# EAGLE board SOFTWEAR_MASTER (EAGLE 9.4.2)
REV: D
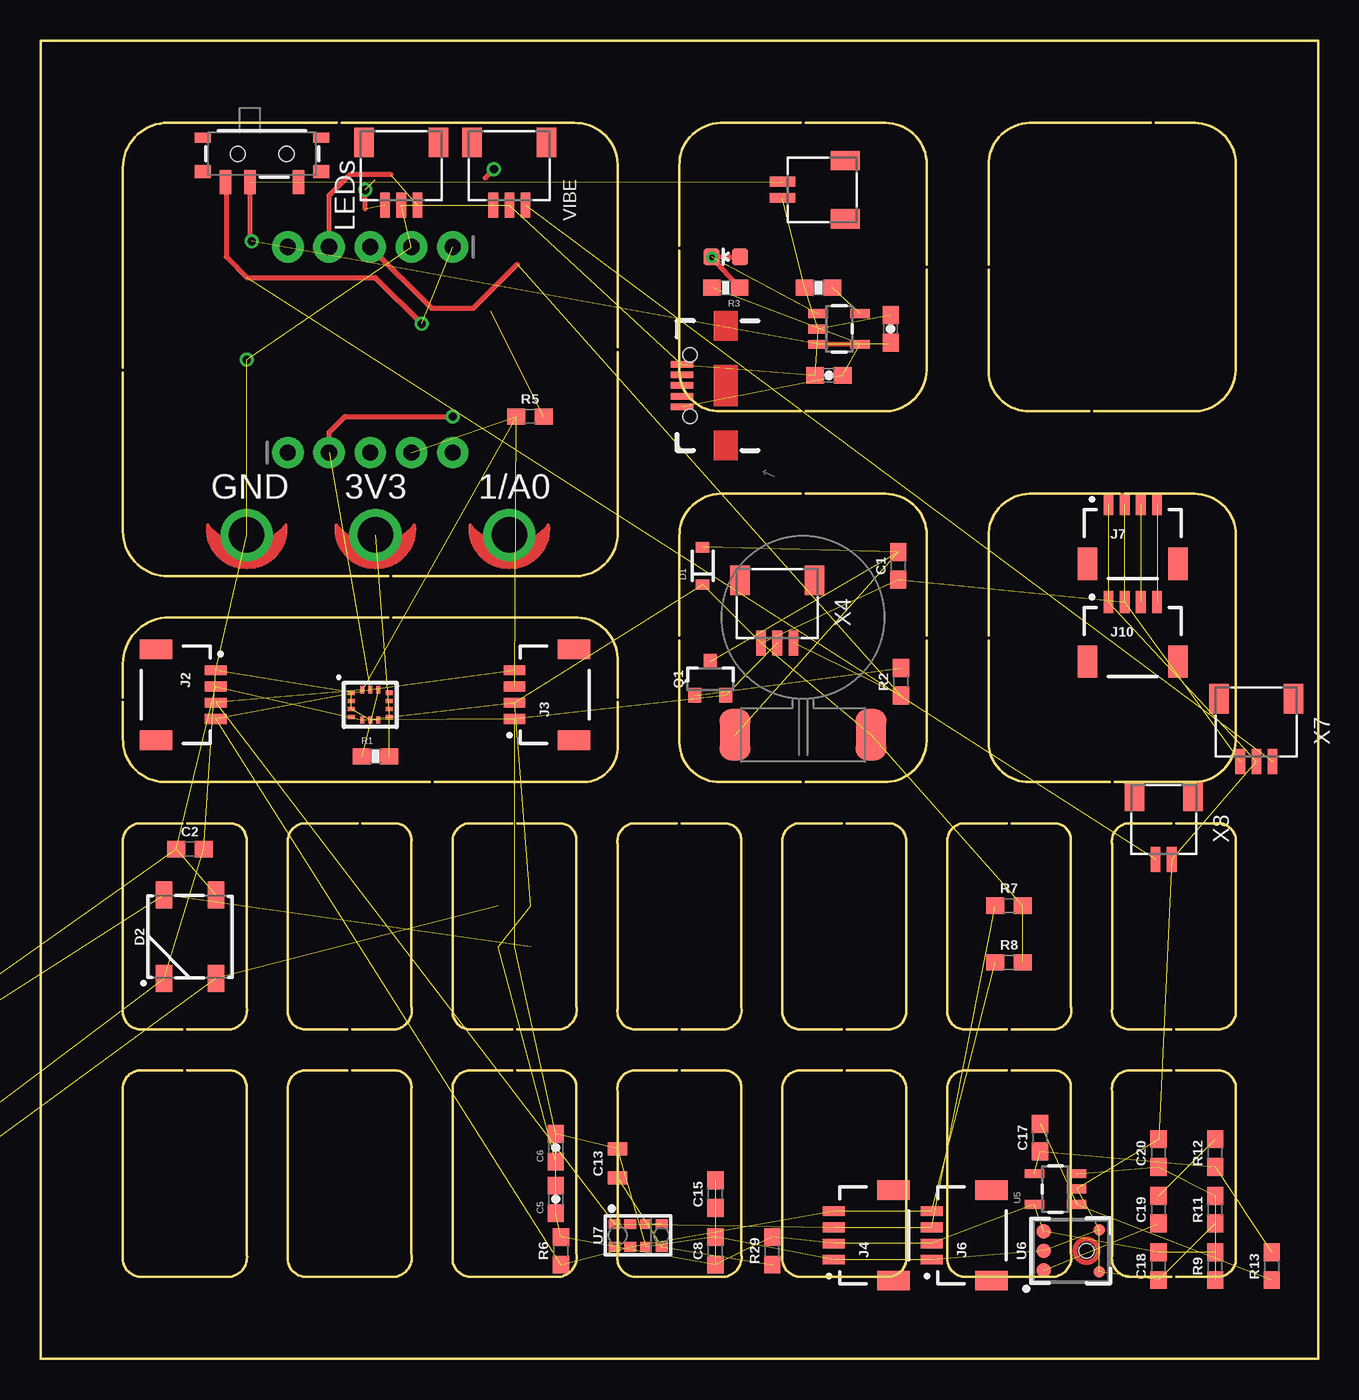
[diagram p0: board, top side]
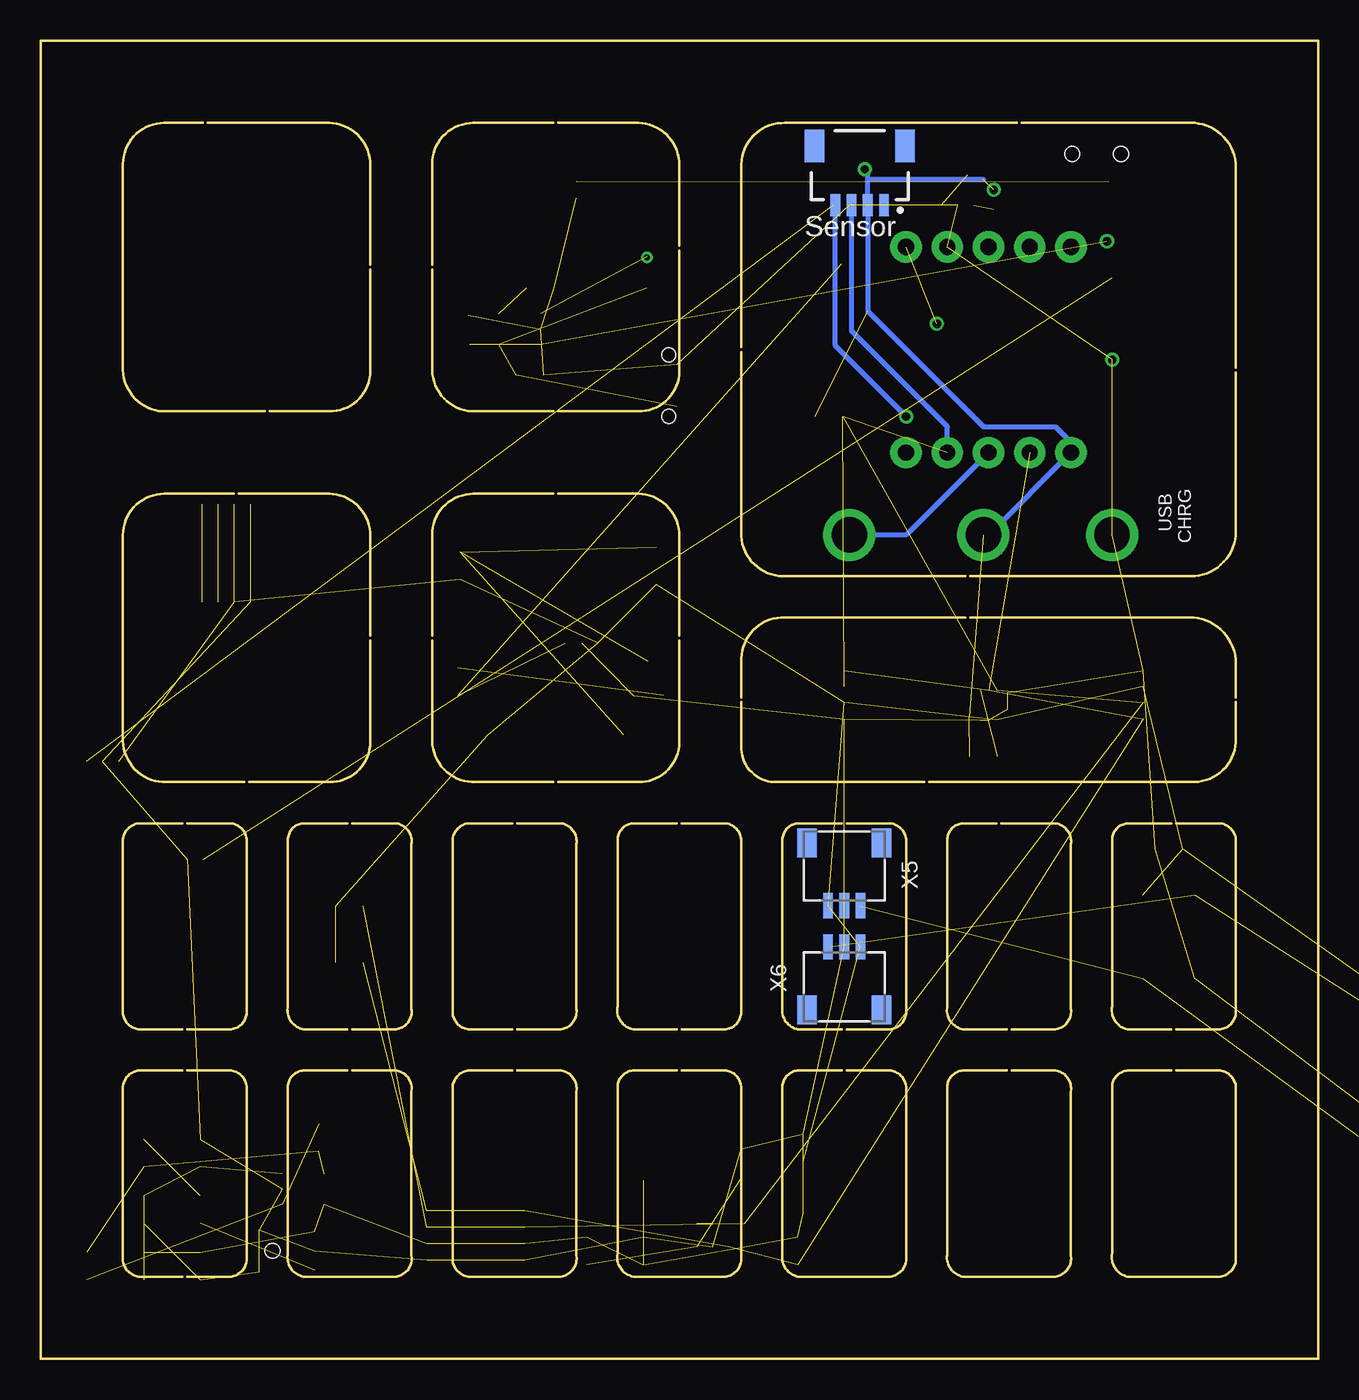
[diagram p1: board, bottom side, seen from below]

Size 78.74 x 81.28 mm. Coordinates in mm from the lower left corner, seen from the top.
Outline: 9.04,20.32 11.75,20.32 arc90 12.7,21.75 12.7,31.91 arc90 11.75,33.02 9.04,33.02
Outline: 8.74,20.32 6.03,20.32 arc-90 5.08,21.59 5.08,31.75 arc-90 6.03,33.02 8.74,33.02
Outline: 8.74,17.78 6.03,17.78 arc90 5.08,16.51 5.08,6.35 arc90 6.03,5.08 11.75,5.08 arc90 12.7,6.51 12.7,16.67 arc90 11.75,17.78 9.04,17.78
Outline: 19.2,20.32 21.91,20.32 arc90 22.86,21.75 22.86,31.91 arc90 21.91,33.02 19.84,33.02
Outline: 18.9,20.32 16.19,20.32 arc-90 15.24,21.59 15.24,31.75 arc-90 16.19,33.02 19.53,33.02
Outline: 18.9,17.78 16.19,17.78 arc90 15.24,16.51 15.24,6.35 arc90 16.19,5.08 21.91,5.08 arc90 22.86,6.51 22.86,16.67 arc90 21.91,17.78 19.2,17.78
Outline: 29.06,17.78 26.35,17.78 arc90 25.4,16.51 25.4,6.35 arc90 26.35,5.08 32.07,5.08 arc90 33.02,6.51 33.02,16.67 arc90 32.07,17.78 29.36,17.78
Outline: 29.36,20.32 32.07,20.32 arc90 33.02,21.75 33.02,31.91 arc90 32.07,33.02 29.36,33.02
Outline: 29.06,20.32 26.35,20.32 arc-90 25.4,21.59 25.4,31.75 arc-90 26.35,33.02 29.06,33.02
Outline: 39.22,17.78 36.51,17.78 arc90 35.56,16.51 35.56,6.35 arc90 36.51,5.08 42.23,5.08 arc90 43.18,6.51 43.18,16.67 arc90 42.23,17.78 39.52,17.78
Outline: 39.52,20.32 42.23,20.32 arc90 43.18,21.75 43.18,31.91 arc90 42.23,33.02 39.52,33.02
Outline: 39.22,20.32 36.51,20.32 arc-90 35.56,21.59 35.56,31.75 arc-90 36.51,33.02 39.22,33.02
Outline: 49.38,17.78 46.67,17.78 arc90 45.72,16.51 45.72,6.35 arc90 46.67,5.08 52.39,5.08 arc90 53.34,6.35 53.34,16.51 arc90 52.39,17.78 49.68,17.78
Outline: 49.68,20.32 52.39,20.32 arc90 53.34,21.59 53.34,31.75 arc90 52.39,33.02 49.68,33.02
Outline: 49.38,20.32 46.67,20.32 arc-90 45.72,21.59 45.72,31.75 arc-90 46.67,33.02 49.38,33.02
Outline: 59.84,20.32 62.55,20.32 arc90 63.5,21.75 63.5,31.91 arc90 62.55,33.02 59.84,33.02
Outline: 59.54,20.32 56.83,20.32 arc-90 55.88,21.59 55.88,31.75 arc-90 56.83,33.02 59.54,33.02
Outline: 59.54,17.78 56.83,17.78 arc90 55.88,16.51 55.88,6.35 arc90 56.83,5.08 62.55,5.08 arc90 63.5,6.51 63.5,16.67 arc90 62.55,17.78 59.84,17.78
Outline: 69.7,33.02 66.99,33.02 arc90 66.04,31.75 66.04,21.59 arc90 66.99,20.32 69.7,20.32
Outline: 70,33.02 72.71,33.02 arc-90 73.66,31.75 73.66,21.59 arc-90 72.71,20.32 70,20.32
Outline: 69.7,17.78 66.99,17.78 arc90 66.04,16.51 66.04,6.35 arc90 66.99,5.08 69.7,5.08
Outline: 70,17.78 72.71,17.78 arc-90 73.66,16.51 73.66,6.35 arc-90 72.71,5.08 70,5.08
Outline: 5.08,40.49 5.08,38.26 arc90 7.62,35.56 23.98,35.56
Outline: 5.08,40.79 5.08,42.86 arc-90 7.94,45.72 21.44,45.72
Outline: 35.56,40.79 35.56,43.18 arc90 32.86,45.72 21.74,45.72
Outline: 35.56,40.49 35.56,37.78 arc-90 33.5,35.56 24.28,35.56
Outline: 46.84,53.34 41.91,53.34 arc90 39.37,50.72 39.37,44.6
Outline: 47.14,53.34 52.07,53.34 arc-90 54.61,50.8 54.61,44.6
Outline: 47.14,35.56 51.91,35.56 arc90 54.61,38.1 54.61,44.3
Outline: 46.84,35.56 41.91,35.56 arc-90 39.37,38.02 39.37,44.3
Outline: 58.42,44.3 58.42,38.02 arc90 60.96,35.56 65.89,35.56
Outline: 58.42,44.6 58.42,50.72 arc-90 60.96,53.34 66.52,53.34
Outline: 58.42,67.16 58.42,60.88 arc90 60.96,58.42 64.62,58.42
Outline: 58.42,67.46 58.42,73.58 arc-90 60.96,76.2 68.43,76.2
Outline: 54.61,67.46 54.61,73.66 arc90 52.07,76.2 47.14,76.2
Outline: 54.61,67.16 54.61,60.96 arc-90 51.91,58.42 47.14,58.42
Outline: 35.56,62.08 35.56,50.96 arc-90 33.02,48.26 21.74,48.26
Outline: 35.56,62.38 35.56,73.66 arc90 32.86,76.2 18.57,76.2
Outline: 5.08,60.81 5.08,51.28 arc90 7.62,48.26 21.44,48.26
Outline: 5.08,61.11 5.08,73.18 arc-90 7.62,76.2 18.26,76.2
Outline: 66.83,53.34 71.12,53.34 arc-90 73.66,50.8 73.66,38.1 arc-90 70.96,35.56 66.19,35.56
Outline: 64.92,58.42 70.96,58.42 arc90 73.66,60.96 73.66,73.66 arc90 71.12,76.2 68.73,76.2
Outline: 46.84,76.2 41.91,76.2 arc90 39.37,73.58 39.37,68.64
Outline: 39.37,68.34 39.37,60.88 arc90 41.91,58.42 46.84,58.42
Outline: 0,0 0,81.28 78.74,81.28 78.74,0 0,0
Copper layers (1*16): Top 0.035mm / dielectric 1.5mm / Bottom 0.035mm
Design rules "SparkFun-2-layer-TIGHT": minimum track width 7mil, minimum drill 15mil, track to track 7mil, track to pad 7mil, pad to pad 7mil, via to via 7mil, smd to smd 7mil, copper to edge 7mil, drill to drill 7mil, minimum pad ring 7mil, minimum via ring 7mil, stop-mask expansion 4mil, vias tented up to drill 25mil, thermal gap 10mil
Net classes: 1 power: width 0.305 mm

## Footprints (pad centres in the part's own frame; a part is rotated, then mirrored left to right if it is on the bottom)
0603 = smd 1.1 x 1: 1 -0.85,0; 2 0.85,0
0603-CAP = smd 1.1 x 1: 1 -0.85,0; 2 0.85,0
0805 = smd 0.8 x 1.2: 1 -0.9,0; 2 0.9,0
SOD-323 = smd 0.63 x 0.83: 1 -1.15,0; 2 1.15,0
WS2812B = smd 1.651 x 1: 1 2.577,-1.6; 2 2.577,1.6; 3 -2.577,1.6; 4 -2.577,-1.6
LED-0603 = smd 1 x 1: A 0,-0.877; C 0,0.877
PETAL-SMALL = drill 2.2: 1 0,0
JST04_1MM_RA = smd 0.6 x 1.35: 1 -1.5,0; 2 -0.5,0; 3 0.5,0; 4 1.5,0 | smd 1.2 x 2: NC1 2.8,-3.675; NC2 -2.8,-3.675
1X05_ROUND_76 = drill 1 pad 1.93: 1 -5.08,0; 2 -2.54,0; 3 0,0; 4 2.54,0; 5 5.08,0
USB-AB-MICRO-SMD_V03 = smd 1.4 x 0.4: D+1 2.7,0; D-1 2.7,0.65; GND1 2.7,-1.3; ID1 2.7,-0.65; VBUS1 2.7,1.3 | hole 0.85: 2.2,1.9; 2.2,-1.9
VIBE-MOTOR-10MM-SMD = smd 1.905 x 3.175: P$1 4.191,-7.239; P$2 -4.191,-7.239
SOT23-3 = smd 0.8 x 0.9: 1 -0.95,-1; 2 0.95,-1; 3 0,1.1
0603-RES = smd 1.1 x 1: 1 -0.85,0; 2 0.85,0
SWITCH_SPST_SMD_A = smd 0.7 x 1.5: 1 -2.25,-1.75; 2 -0.75,-1.75; 3 2.25,-1.75 | smd 1 x 0.6: GND1 -3.65,1; GND3 3.65,1 | smd 1 x 0.8: GND2 -3.65,-1.1; GND4 3.65,-1.1 | hole 0.9: -1.5,0; 1.5,0
SOT23-5 = smd 0.55 x 1.2: 1 -0.95,-1.3; 2 0,-1.3; 3 0.95,-1.3; 4 0.95,1.3; 5 -0.95,1.3
LGA14L_DOT_INDICATOR = smd 0.45 x 0.25: 1 -1.175,0.75; 2 -1.175,0.25; 3 -1.175,-0.25; 4 -1.175,-0.75; 8 1.175,-0.75; 9 1.175,-0.25; 10 1.175,0.25; 11 1.175,0.75 | smd 0.25 x 0.45: 5 -0.5,-0.925; 6 0,-0.925; 7 0.5,-0.925; 12 0.5,0.925; 13 0,0.925; 14 -0.5,0.925
ADMP401 = smd 0.9 x 0.9: 1 -1.2,2.62; 5 1.2,2.62; 6 0,2.62 | smd 0.7 x 0.7: 2 1.3,-0.8; 4 -1.3,-0.8 | hole 0.9: 0,0
APDS-9960 = smd 0.6 x 0.72: 1 0.7,1.455; 2 0.7,0.485; 3 0.7,-0.485; 4 0.7,-1.455; 5 -0.7,-1.455; 6 -0.7,-0.485; 7 -0.7,0.485; 8 -0.7,1.455
SM02B-SRSS-TB = smd 0.6 x 1.55: 1 0.5,0; 2 -0.5,0 | smd 1.2 x 1.8: M1 1.8,3.875; M2 -1.8,3.875
SM03B-SRSS-TB = smd 0.6 x 1.55: 1 1,0; 2 0,0; 3 -1,0 | smd 1.2 x 1.8: M1 2.3,3.875; M2 -2.3,3.875

## Placement (x,y rotation side)
C1  0.1uF  [0603]  52.86,48.9 90 top
C2  0.1uF  [0603]  9.21,31.43 0 top
C3  4.7uF  [0603-CAP]  48.58,60.64 180 top
C4  4.7uF  [0603-CAP]  52.39,63.5 90 top
C5  0.1uF  [0603-CAP]  31.75,9.84 90 top
C6  0.1uF  [0603-CAP]  31.75,13.02 90 top
C7  0.1uF  [0603]  -76.2,-43.18 0 top  (outside the outline)
C8  0.1uF  [0603]  41.59,6.67 90 top
C9  0.1uF  [0603]  -76.2,-68.58 0 top  (outside the outline)
C10  0.1uF  [0603]  -60.96,-101.6 0 top  (outside the outline)
C11  0.1uF  [0603]  -77.47,-107.95 0 top  (outside the outline)
C12  0.1uF  [0603]  -77.47,-213.36 0 top  (outside the outline)
C13  10uF  [0805]  35.56,12.06 90 top
C14  0.1uF  [0603]  -77.47,-217.17 0 top  (outside the outline)
C15  1.0uF  [0603]  41.59,10.16 90 top
C16  0.1uF  [0603]  -60.96,-177.8 0 top  (outside the outline)
C17  100pF  [0603]  61.6,13.65 90 top
C18  0.1uF  [0603]  68.9,5.71 90 top
C19  4.7uF  [0603]  68.9,9.21 90 top
C20  1.0uF  [0603]  68.9,12.7 90 top
C21  0.1uF  [0603]  -77.47,-184.15 0 top  (outside the outline)
C22  0.1uF  [0603]  -77.47,-209.55 0 top  (outside the outline)
D1  [SOD-323]  40.8,48.9 90 top
D2  WS2812B  [WS2812B]  9.21,26.03 90 top
D3  WS2812B  [WS2812B]  -74.93,-24.13 0 top  (outside the outline)
D4  WS2812B  [WS2812B]  -74.93,-49.53 0 top  (outside the outline)
D5  WS2812B  [WS2812B]  -76.2,-76.2 0 top  (outside the outline)
D6  WS2812B  [WS2812B]  -68.58,-76.2 0 top  (outside the outline)
D7  WS2812B  [WS2812B]  -76.2,-114.3 0 top  (outside the outline)
D8  WS2812B  [WS2812B]  -68.58,-114.3 0 top  (outside the outline)
D9  WS2812B  [WS2812B]  -76.2,-152.4 0 top  (outside the outline)
D10  WS2812B  [WS2812B]  -68.58,-152.4 0 top  (outside the outline)
D11  RED  [LED-0603]  42.23,67.94 90 top
D12  WS2812B  [WS2812B]  -76.2,-190.5 0 top  (outside the outline)
FRAME1  FRAME-LETTERNO_PACKAGE  [DUMMY]  5.08,34.92 0 top
FRAME2  FRAME-LETTERNO_PACKAGE  [DUMMY]  46.67,5.08 90 top
FRAME3  FRAME-LETTERNO_PACKAGE  [DUMMY]  5.08,19.69 0 top
FRAME4  FRAME-LETTERNO_PACKAGE  [DUMMY]  52.7,57.15 90 top
FRAME5  FRAME-LETTERNO_PACKAGE  [DUMMY]  56.2,26.67 90 top
FRAME6  FRAME-LETTERNO_PACKAGE  [DUMMY]  -78.74,-71.12 0 top  (outside the outline)
J1  SEWTAP_SMALL  [PETAL-SMALL]  28.89,50.8 0 top
J2  QWIIC_RIGHT_ANGLE  [JST04_1MM_RA]  10.8,40.96 270 top
J3  QWIIC_RIGHT_ANGLE  [JST04_1MM_RA]  29.21,40.96 90 top
J4  QWIIC_RIGHT_ANGLE  [JST04_1MM_RA]  48.9,7.62 90 top
J5  SEWTAP_SMALL  [PETAL-SMALL]  20.64,50.8 0 top
J6  QWIIC_RIGHT_ANGLE  [JST04_1MM_RA]  54.93,7.62 90 top
J7  QWIIC_RIGHT_ANGLE  [JST04_1MM_RA]  67.31,52.71 0 top
J8  SEWTAP_SMALL  [PETAL-SMALL]  12.7,50.8 0 top
J9  QWIIC_RIGHT_ANGLE  [JST04_1MM_RA]  28.26,71.12 180 bottom
J10  QWIIC_RIGHT_ANGLE  [JST04_1MM_RA]  67.31,46.67 0 top
JP3  [1X05_ROUND_76]  20.32,68.55 180 top
JP4  [1X05_ROUND_76]  20.32,55.88 0 top
JP9  Micro USB  [USB-AB-MICRO-SMD_V03]  42.23,60.01 180 top
M1  MOTORSMD  [VIBE-MOTOR-10MM-SMD]  46.99,45.72 0 top
Q1  500mA/300V  [SOT23-3]  41.28,41.91 0 top
R1  10K  [0603-RES]  20.64,37.15 0 top
R2  1k  [0603]  53.02,41.75 90 top
R3  330  [0603-RES]  42.23,66.04 180 top
R4  2.0k  [0603-RES]  47.94,66.04 180 top
R5  4.7k  [0603]  30.16,58.1 0 top
R6  4.7k  [0603]  32.07,6.67 90 top
R7  4.7k  [0603]  59.69,27.94 0 top
R8  4.7k  [0603]  59.69,24.45 0 top
R9  10k  [0603]  72.39,5.71 90 top
R11  10k  [0603]  72.39,9.21 90 top
R12  1.5k  [0603]  72.39,12.7 90 top
R13  100k  [0603]  75.88,5.71 90 top
R29  0  [0603]  45.09,6.67 90 top
S1  [SWITCH_SPST_SMD_A]  13.65,74.29 0 top
U1  MCP73831  [SOT23-5]  49.21,63.5 270 top
U2  LSM6DS3  [LGA14L_DOT_INDICATOR]  20.32,40.32 0 top
U5  OPA344  [SOT23-5]  62.55,10.48 90 top
U6  ADMP401  [ADMP401]  64.45,6.67 90 top
U7  APDS-9960  [APDS-9960]  36.83,7.62 90 top
X1  SM02B-SRSS-TB  [SM02B-SRSS-TB]  45.72,72.07 270 top
X2  SM03B-SRSS-TB  [SM03B-SRSS-TB]  22.23,71.12 0 top
X3  SM03B-SRSS-TB  [SM03B-SRSS-TB]  28.89,71.12 0 top
X4  SM03B-SRSS-TB  [SM03B-SRSS-TB]  45.4,44.13 0 top
X5  SM03B-SRSS-TB  [SM03B-SRSS-TB]  29.21,27.94 0 bottom
X6  SM03B-SRSS-TB  [SM03B-SRSS-TB]  29.21,25.4 180 bottom
X7  SM03B-SRSS-TB  [SM03B-SRSS-TB]  74.93,36.83 0 top
X8  SM02B-SRSS-TB  [SM02B-SRSS-TB]  69.22,30.8 0 top
X9  SM03B-SRSS-TB  [SM03B-SRSS-TB]  -67.31,-33.02 0 top  (outside the outline)
X10  SM03B-SRSS-TB  [SM03B-SRSS-TB]  -67.31,-39.37 0 top  (outside the outline)
X11  SM03B-SRSS-TB  [SM03B-SRSS-TB]  -67.31,-58.42 0 top  (outside the outline)
X12  SM03B-SRSS-TB  [SM03B-SRSS-TB]  -67.31,-64.77 0 top  (outside the outline)
X13  SM03B-SRSS-TB  [SM03B-SRSS-TB]  -68.58,-85.09 0 top  (outside the outline)
X14  SM03B-SRSS-TB  [SM03B-SRSS-TB]  -68.58,-91.44 0 top  (outside the outline)
X15  SM03B-SRSS-TB  [SM03B-SRSS-TB]  -68.58,-97.79 0 top  (outside the outline)
X16  SM03B-SRSS-TB  [SM03B-SRSS-TB]  -68.58,-104.14 0 top  (outside the outline)
X17  SM03B-SRSS-TB  [SM03B-SRSS-TB]  -68.58,-123.19 0 top  (outside the outline)
X18  SM03B-SRSS-TB  [SM03B-SRSS-TB]  -68.58,-129.54 0 top  (outside the outline)
X19  SM03B-SRSS-TB  [SM03B-SRSS-TB]  -68.58,-135.89 0 top  (outside the outline)
X20  SM03B-SRSS-TB  [SM03B-SRSS-TB]  -68.58,-142.24 0 top  (outside the outline)
X21  SM03B-SRSS-TB  [SM03B-SRSS-TB]  -68.58,-161.29 0 top  (outside the outline)
X22  SM03B-SRSS-TB  [SM03B-SRSS-TB]  -68.58,-167.64 0 top  (outside the outline)
X23  SM03B-SRSS-TB  [SM03B-SRSS-TB]  -68.58,-173.99 0 top  (outside the outline)
X24  SM03B-SRSS-TB  [SM03B-SRSS-TB]  -68.58,-180.34 0 top  (outside the outline)
X25  SM03B-SRSS-TB  [SM03B-SRSS-TB]  -68.58,-199.39 0 top  (outside the outline)
X26  SM03B-SRSS-TB  [SM03B-SRSS-TB]  -68.58,-205.74 0 top  (outside the outline)

## Library data of the parts
C1 C2 C7-C12 C14 C16 C18 C21 C22 = SparkFun-Capacitors; PROD_ID: CAP-00810
C3 C4 C19 = SparkFun-Capacitors; PROD_ID: CAP-08280
C5 C6 = SparkFun-Capacitors; PROD_ID: CAP-08390
C13 = SparkFun-Capacitors; PROD_ID: CAP-11330
C15 C20 = SparkFun-Capacitors; PROD_ID: CAP-00868
C17 = SparkFun-Capacitors; PROD_ID: CAP-07883
D1 U5 = SparkFun
D2-D10 D12 = SparkFun-LED; PROD_ID: DIO-12503
D11 = SparkFun-LED; PROD_ID: DIO-00819
FRAME1-FRAME6 = SparkFun-Aesthetics; DESIGNER: Nobody; VERSION: v01
J1 J5 J8 = LilyPad-Wearables
J2-J4 J6 J7 J10 = SparkFun-Connectors; PROD_ID: CONN-13694
J9 = JSTSHBatteryConnector; PROD_ID: CONN-13694
JP3 JP4 = microbuilder
JP9 = SparkFun-Connectors; PROD_ID: CONN-11794
M1 = Testing
Q1 = SparkFun-DiscreteSemi; PROD_ID: TRANS-09116
R1 R9 R11 = SparkFun-Resistors; PROD_ID: RES-00824
R2 = SparkFun-Resistors; PROD_ID: RES-07856
R3 = SparkFun-Resistors; PROD_ID: RES-00818
R4 = SparkFun-Resistors; PROD_ID: RES-08296
R5-R8 = SparkFun-Resistors; PROD_ID: RES-07857
R12 = SparkFun-Resistors; PROD_ID: RES-08306
R13 = SparkFun-Resistors; PROD_ID: RES-07828
R29 = SparkFun-Resistors; PROD_ID: RES-08609
S1 = SparkFun-Switches; PROD_ID: SWCH-10651; SF_SKU: COM-10860
U1 = SparkFun-PowerIC; PROD_ID: IC-09995
U2 = LSM6DS3; PROD_ID: IC-12969
U6 = SparkFun-Sensors; PROD_ID: IC-09773
U7 = SparkFun-Sensors; PROD_ID: SEN-12005
X1-X26 = con-JST SH (1)

## Nets
1: J7.4 J10.4
2: J7.3 J10.3
3: X3.1 X7.1
3.3V: C1.1 C2.1 C5.1 C6.1 C7.1 C8.1 C9.1 C10.1 C11.1 C12.1 C14.1 C15.1 C16.1 C18.2 C21.1 C22.1 D1.1 D2.1 D3.1 D4.1 D5.1 D6.1 D7.1 D8.1 D9.1 D10.1 D12.1 J2.2 J3.2 J4.2 J5.1 J6.2 J7.2 J9.2 J10.2 JP4.1 M1.P$1 R1.2 R5.2 R6.2 R7.2 R8.2 R9.2 R29.2 U2.5 U2.8 U5.5 U6.5 U7.8 X2.3 X3.3 X4.3 X5.3 X6.3 X7.3 X9.3 X10.3 X11.3 X12.3 X13.3 X14.3 X15.3 X16.3 X17.3 X18.3 X19.3 X20.3 X21.3 X22.3 X23.3 X24.3 X25.3 X26.3
A3: C17.2 R13.1 U5.1
CS: R1.1 U2.12
D1_A0_PA02: J1.1 JP4.3
DI: D2.4 D3.4 D4.4 D5.4 D6.4 D7.4 D8.4 D9.4 D10.4 D12.4 X5.1 X9.1 X11.1 X13.1 X15.1 X17.1 X19.1 X21.1 X23.1 X25.1
DO: D2.2 D3.2 D4.2 D5.2 D6.2 D7.2 D8.2 D9.2 D10.2 D12.2 X6.1 X10.1 X12.1 X14.1 X16.1 X18.1 X20.1 X22.1 X24.1 X26.1
GND: C2.2 C3.2 C4.2 C5.2 C6.2 C7.2 C8.2 C9.2 C10.2 C11.2 C12.2 C13.2 C14.2 C15.2 C16.2 C18.1 C20.2 C21.2 C22.2 D2.3 D3.3 D4.3 D5.3 D6.3 D7.3 D8.3 D9.3 D10.3 D12.3 J2.1 J3.1 J4.1 J6.1 J7.1 J8.1 J9.1 J10.1 JP3.2 JP9.GND1 Q1.2 R4.2 R11.1 U1.2 U2.1 U2.2 U2.3 U2.6 U2.7 U5.2 U6.2 U6.4 U6.6 U7.6 X1.1 X2.2 X3.2 X4.2 X5.2 X6.2 X7.2 X8.1 X9.2 X10.2 X11.2 X12.2 X13.2 X14.2 X15.2 X16.2 X17.2 X18.2 X19.2 X20.2 X21.2 X22.2 X23.2 X24.2 X25.2 X26.2
LEDA: C13.1 R29.1 U7.5
N$1: C19.1 U6.1
N$2: Q1.1 R2.2
N$3: D11.A R3.1
N$5: U7.3 U7.4
N$6: C17.1 R12.1 R13.2 U5.4
N$10: C19.2 R12.2
N$11: C20.1 R9.1 R11.2 U5.3
NEO: JP3.4 X2.1
PROG: R4.1 U1.5
SCL: J2.4 J3.4 J4.4 J6.4 J9.4 JP4.2 R6.1 R8.1 U2.13 U7.7
SDA: J2.3 J3.3 J4.3 J6.3 J9.3 JP4.4 R5.1 R7.1 U2.14 U7.1
STAT: D11.C U1.1
SW: C1.2 D1.2 M1.P$2 Q1.3
VBAT: JP3.1 S1.1 X8.2
VBAT_OUT: C4.1 S1.2 U1.3 X1.2
VIBE: JP3.3 R2.1 X4.1
VUSB: C3.1 JP9.VBUS1 R3.2 U1.4

## Tracks (layer width: path | path; a pad name or v marks a point on that pad's centre or on a via)
1  (1 unrouted)
2  (1 unrouted)
3  (1 unrouted)
3.3V  (via drill 0.51)  (71 unrouted)
  Top 0.305: 27.39,72.79 v27.94,73.34 | 20,70.89 v20,72.07
  Bottom 0.305: J5.1 20.32,50.8 JP4.1 15.24,56.51 16.19,57.47 20.64,57.47 27.76,64.59 J9.2 27.76,72.71 | 27.76,72.71 27.76,73.16 v27.94,73.34 | 20.64,72.71 27.76,72.71
A3  (2 unrouted)
CS  (1 unrouted)
D1_A0_PA02
  Bottom 0.305: JP4.3 25.4,50.8 J1.1
DI  (19 unrouted)
DO  (19 unrouted)
GND  (via drill 0.51)  (79 unrouted)
  other vias: 12.7,61.6
LEDA  (2 unrouted)
N$1  (1 unrouted)
N$2  (1 unrouted)
N$3  (via drill 0.35)
  Top 0.305: R3.1 v41.38,67.92 D11.A
N$5  (1 unrouted)
N$6  (3 unrouted)
N$10  (1 unrouted)
N$11  (3 unrouted)
NEO  (1 unrouted)
  Top 0.305: JP3.4 17.78,71.75 19.05,73.03 21.59,73.03
PROG  (1 unrouted)
SCL  (via drill 0.51)  (8 unrouted)
  Top 0.305: JP4.2 17.78,57.15 18.73,58.1 v25.4,58.1
  Bottom 0.305: J9.4 29.76,62.46 v25.4,58.1
SDA  (8 unrouted)
  Bottom 0.305: JP4.4 22.86,57.47 28.76,63.37 J9.3
STAT  (1 unrouted)
SW  (3 unrouted)
VBAT  (via drill 0.51)  (2 unrouted)
  Top 0.305: S1.1 11.43,72.52 11.43,67.94 12.7,66.68 20.64,66.68 v23.5,63.82
VBAT_OUT  (via drill 0.51)  (3 unrouted)
  Top 0.305: 52.29,62.55 C4.1 52.49,62.55 | S1.2 12.9,69.01 v13.02,68.9
VIBE  (2 unrouted)
  Top 0.305: 29.39,67.49 26.67,64.77 24.11,64.77 JP3.3
VUSB  (3 unrouted)
  Top 0.305: U1.4 47.91,62.55

## Text on the board
tPlace: LEDs | VIBE | GND | 3V3 | 1/A0
bPlace: Sensor | USB / CHRG